# EAGLE board power_injector_rev_c (EAGLE 6.6.0)
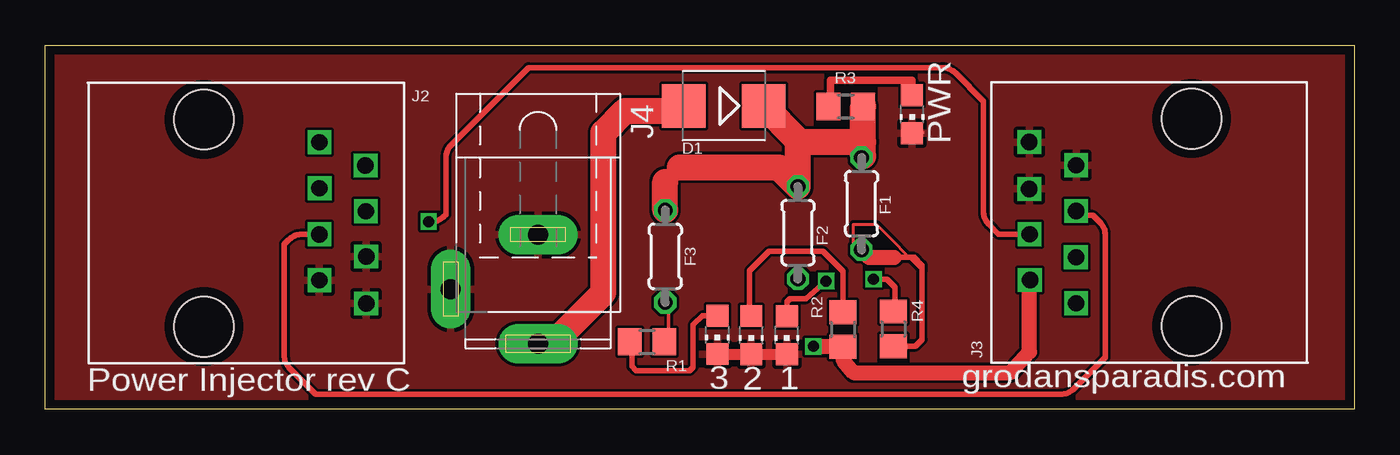
[diagram p0: board, top side]
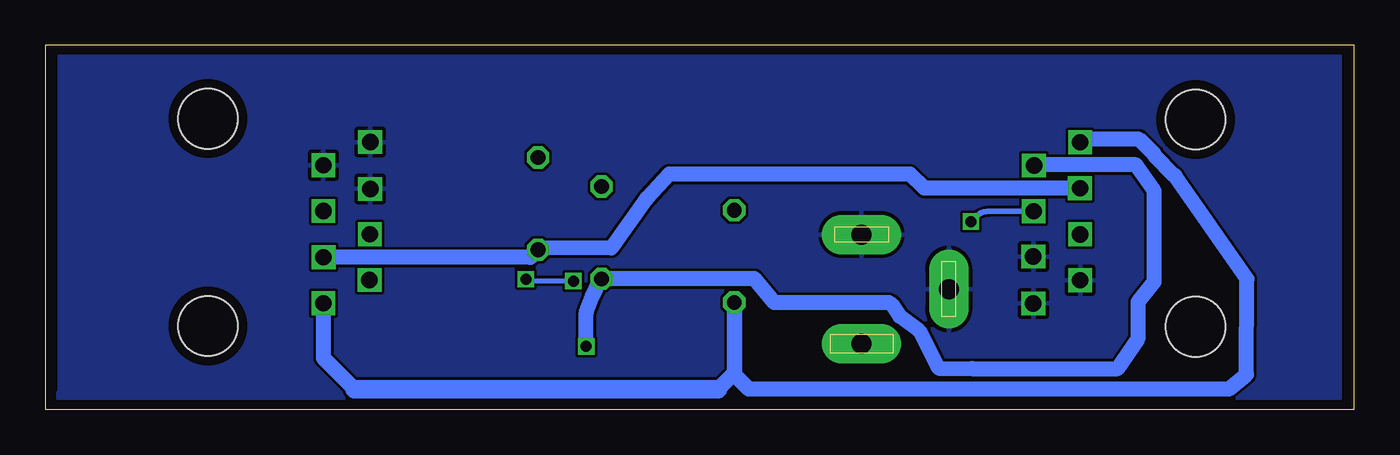
[diagram p1: board, bottom side, seen from below]

Size 72 x 20 mm. Coordinates in mm from the lower left corner, seen from the top.
Outline: 0,0 0,20 72,20 72,0 0,0
Copper layers (1*16): Top 0.035mm / dielectric 1.5mm / Bottom 0.035mm
Design rules "PCB-POOL": minimum track width 6mil, minimum drill 12mil, track to track 6mil, track to pad 6mil, pad to pad 6mil, via to via 6mil, smd to smd 6mil, copper to edge 20mil, drill to drill 8mil, minimum pad ring 8mil, minimum via ring 6mil, stop-mask expansion 3mil, vias tented up to drill 0mil, thermal gap 8mil

## Footprints (pad centres in the part's own frame; a part is rotated, then mirrored left to right if it is on the bottom)
SMB = smd 2.4 x 2.4: A 2.2,0; C -2.2,0
0204/5 = drill 0.813 octagon: 1 -2.54,0; 2 2.54,0
RJ-45 = drill 0.9 square: 1 -4.45,6.35; 2 -3.17,8.89; 3 -1.92,6.36; 4 -0.65,8.91; 5 0.62,6.35; 6 1.84,8.93; 7 3.14,6.35; 8 4.42,8.93 | hole 3.3: -5.7,0; 5.7,0
SPC4077 = drill 1.1 pad 2.184 long: 1 -3,0; 2 0,-4.8; 3 3,0
CHIP-LED0805 = smd 1.2 x 1.2: A 0,-1.05; C 0,1.05
R0805 = smd 1.3 x 1.5: 1 -0.95,0; 2 0.95,0

## Placement (x,y rotation side)
D1  PMEG3015EH,115  [SMB]  37.32,16.68 180 top
F1  MF-R050  [0204/5]  44.9,11.3 270 top
F2  MF-R050  [0204/5]  41.4,9.7 270 top
F3  MF-R050  [0204/5]  34.1,8.4 270 top
J2  A00-108-220-450  [RJ-45]  8.72,10.23 270 top
J3  A00-108-220-450  [RJ-45]  63.06,10.27 90 top
J4  [SPC4077]  27.1,6.6 270 top
LED1  [CHIP-LED0805]  47.68,16.22 180 top
LED2  [CHIP-LED0805]  36.97,4.08 180 top
LED3  [CHIP-LED0805]  38.83,4.07 180 top
LED4  [CHIP-LED0805]  40.79,4.06 180 top
R1  4k7  [R0805]  33.1,3.7 0 top
R2  4k7  [R0805]  43.88,4.38 270 top
R3  4k7  [R0805]  44.03,16.65 0 top
R4  4k7  [R0805]  46.65,4.41 270 top

## Library data of the parts
D1 = diode
F1-F3 R1-R4 = rcl
J2 J3 = vscpcan
J4 = con-jack-special; OC_FARNELL: unknown; OC_NEWARK: unknown
LED1-LED4 = led

## Nets
+12V: D1.C F1.1 F2.1 F3.1 R3.2
GND: J2.6 J2.7 J2.8 J3.6 J3.7 J3.8 J4.1 J4.2 LED1.C LED2.C LED3.C LED4.C
N$1: LED3.A R2.1
N$2: LED1.A R3.1
N$3: J2.4 J3.4
N$4: J2.5 J3.5
N$6: LED4.A R4.1
N$7: LED2.A R1.1
N$8: D1.A J4.3
PWR1: F3.2 J2.1 J3.1 R1.2
PWR2: F2.2 J2.2 J3.2 R2.2
PWR3: F1.2 J2.3 J3.3 R4.2

## Tracks (layer width: path | path; a pad name or v marks a point on that pad's centre or on a via)
+12V
  Top 0.813: 34.1,12.5 34.9,13.3 | 44.98,13.92 F1.1 44.9,14.6 45,14.7 | 41.4,14.8 41.5,14.7
  Top 1.422: F3.1 34.1,12.5 | 34.9,13.3 40.34,13.3 F2.1 41.4,14.8 D1.C | 44.98,13.92 R3.2 | 41.5,14.7 45,14.7
GND
  Top 0.254: LED1.C 48.26,15.24
  Top 0.61: LED2.C LED3.C LED4.C
  pour Bottom: 0.6,19.6 0.8,19.6 0.8,0.6 71.3,0.6 71.3,0.9 71.2,0.9 71.2,19.7 0.9,19.7
  pour Top: 0.4,19.9 0.4,0.4 0.6,0.2 71.2,0.2 71.8,0.8 71.8,19.4 71.2,20
N$1
  Top 0.305: R2.1 43.88,7.59 42.79,8.68 39.81,8.68 38.74,7.61 38.74,5.21 LED3.A
N$2
  Top 0.254: R3.1 43.18,16.51
  Top 0.406: 43.18,16.51 43.18,18.08 47.66,18.08 LED1.A
N$3  (via drill 0.6)
  Top 0.305: v21.08,10.31 21.23,10.31 arc45 21.93,10.6 22.03,10.7 22.03,13.82 arc-45 22.32,14.52 26.58,18.78 49.35,18.78 arc-45 50.05,18.49 51.61,16.93 51.61,10.86 arc45 51.9,10.16 52.43,9.63 54.13,9.63 arc-45 J3.4
  Bottom 0.305: J2.4 20.1,10.88 arc-45 20.8,10.59 v21.08,10.31
N$4
  Top 0.305: J2.5 14.09,9.61 arc45 13.39,9.32 13.14,9.07 13.14,2.95 arc45 13.43,2.25 14.86,0.82 55.88,0.82 arc45 56.58,1.11 58.31,2.84 58.31,9.57 arc45 58.02,10.27 57.63,10.66 57.27,10.66 arc-45 J3.5
N$6  (via drill 0.6)
  Top 0.305: LED4.A 40.79,5.91 40.95,6.07 41.85,6.07 v42.95,7.04 | v45.56,7.14 46.29,7.14 46.73,6.7 46.73,5.44 R4.1
  Bottom 0.305: v42.95,7.04 45.29,7.07 v45.56,7.14
N$7
  Top 0.305: LED2.A 36.14,5.13 35.64,4.63 35.64,2.31 35.44,2.11 32.5,2.11 32.26,2.35 32.26,3.59 R1.1
N$8
  Top 1.422: J4.3 27.9,3.6 30.7,6.4 30.7,15.2 31.9,16.4 34.84,16.4 D1.A
PWR1
  Top 0.203: R1.2 34.29,3.81 34.29,6.35 F3.2
  Bottom 0.813: 35,1.1 34.1,2 F3.2 34.1,1.9 33.3,1.1 6.9,1.1 5.92,1.9 5.9,7.16 9.85,12.85 9.88,12.85 11,13.97 11,14.02 11.82,14.84 14.91,14.84 J2.1 | 55,1.1 56.7,2.8 J3.1
  Bottom 1.016: 35,1.1 55,1.1
PWR2  (via drill 0.6)
  Top 0.305: 42.27,3.43 v42.25,3.45 | 54.14,7.07 J3.2
  Top 0.813: 42.27,3.43 R2.2 43.88,2.69 44.46,2 53.1,2 54.14,3.15 54.14,7.07
  Bottom 0.305: 41.48,7.08 F2.2
  Bottom 0.813: F2.2 41.36,7.16 33,7.17 31.9,5.86 25.6,5.86 25.44,5.76 25,5.1 23.92,4.3 22.86,2.25 21.02,2.23 13.02,2.23 11.88,3.9 11.88,5.9 11,7 11,12 12,13.43 17.54,13.43 arc-45 J2.2 | v42.25,3.45 42.25,5.3 41.93,6.14 41.48,7.08
PWR3
  Top 0.152: 48.23,7.62 48.26,7.62 45.72,10.16 44.45,10.16 44.45,8.89 F1.2
  Top 0.305: R4.2 47.87,3.46 48.23,3.82 48.23,7.62 48.23,7.92 47.8,8.35 46.76,8.35
  Top 0.813: 46.7,8.35 45.31,8.35 F1.2
  Bottom 0.813: J3.3 45.31,8.35 F1.2 44.82,8.84 40.86,8.87 38.97,11.53 38.91,11.61 37.69,12.93 24.43,12.93 23.65,12.15 J2.3

## Text on the board
tNames: PWR | 3 | 2 | 1 | Power Injector rev C | grodansparadis.com